# Altium PCB pcb.PcbDoc (part 1 of 2)
Units mm, origin at the board's own origin, x right, y up, seen from the top; angles counter-clockwise.
Board outline 134 x 85 mm, 2 copper layers (Top Layer, Bottom Layer), stack 1.575 mm thick; 121 components, 45 nets, 313 pads, 706 vias.
Unrouted connection lines stored in the file: 44.
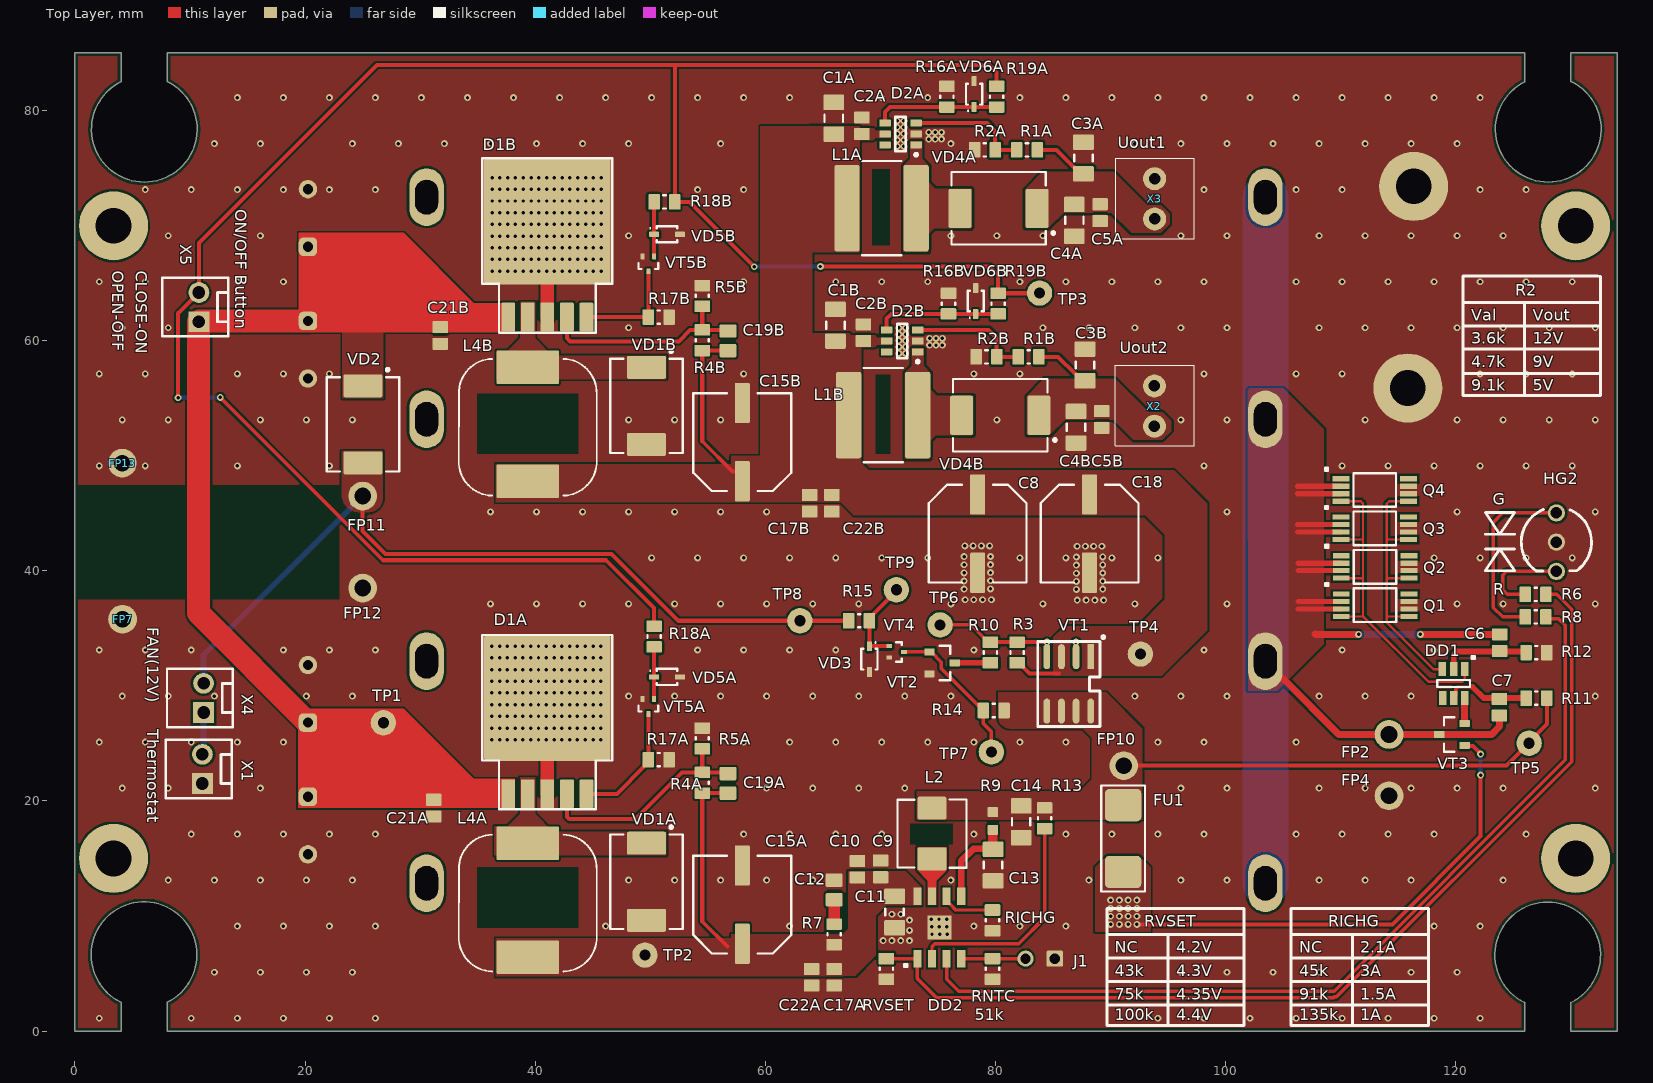
[diagram p0: Top Layer view]
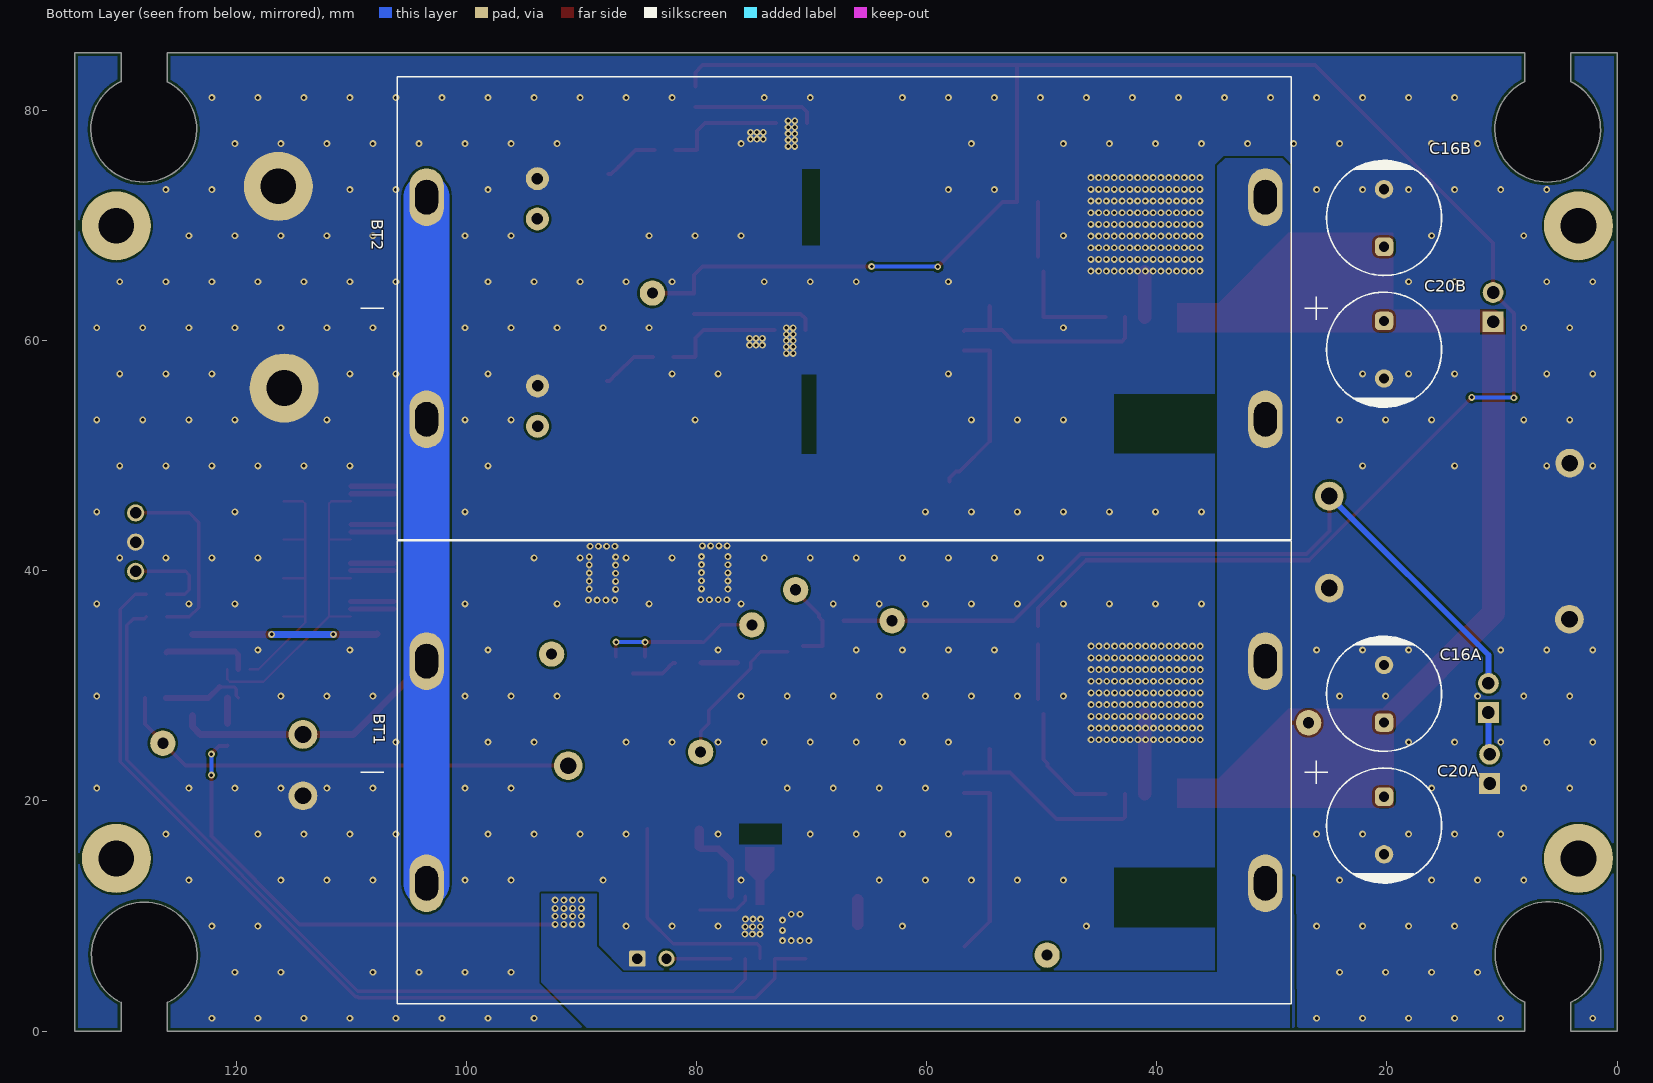
[diagram p1: Bottom Layer view, seen from below]
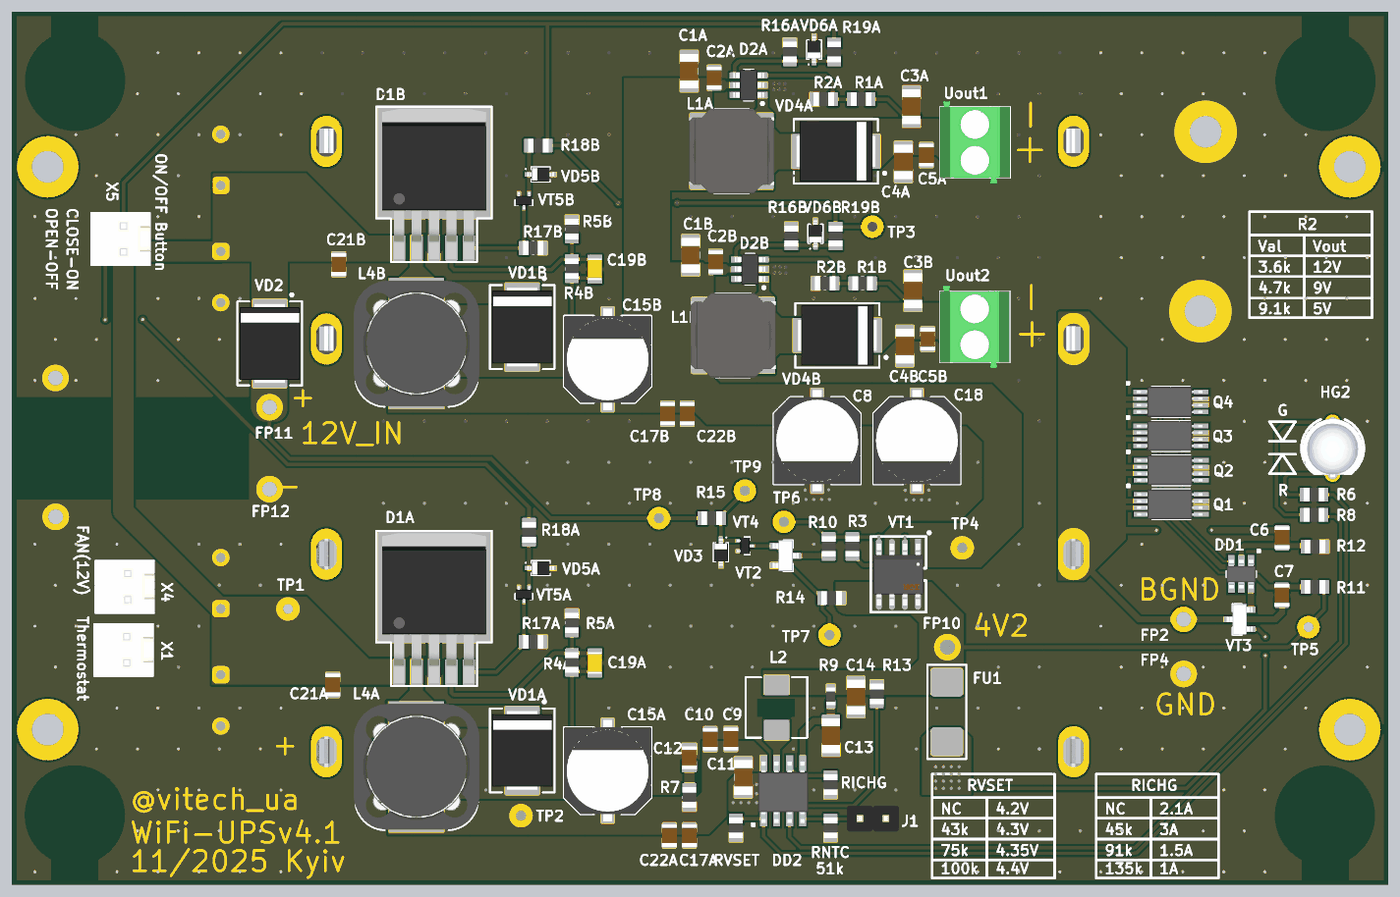
[diagram p3: 3D render of the assembled board from above, using the file's embedded part models]
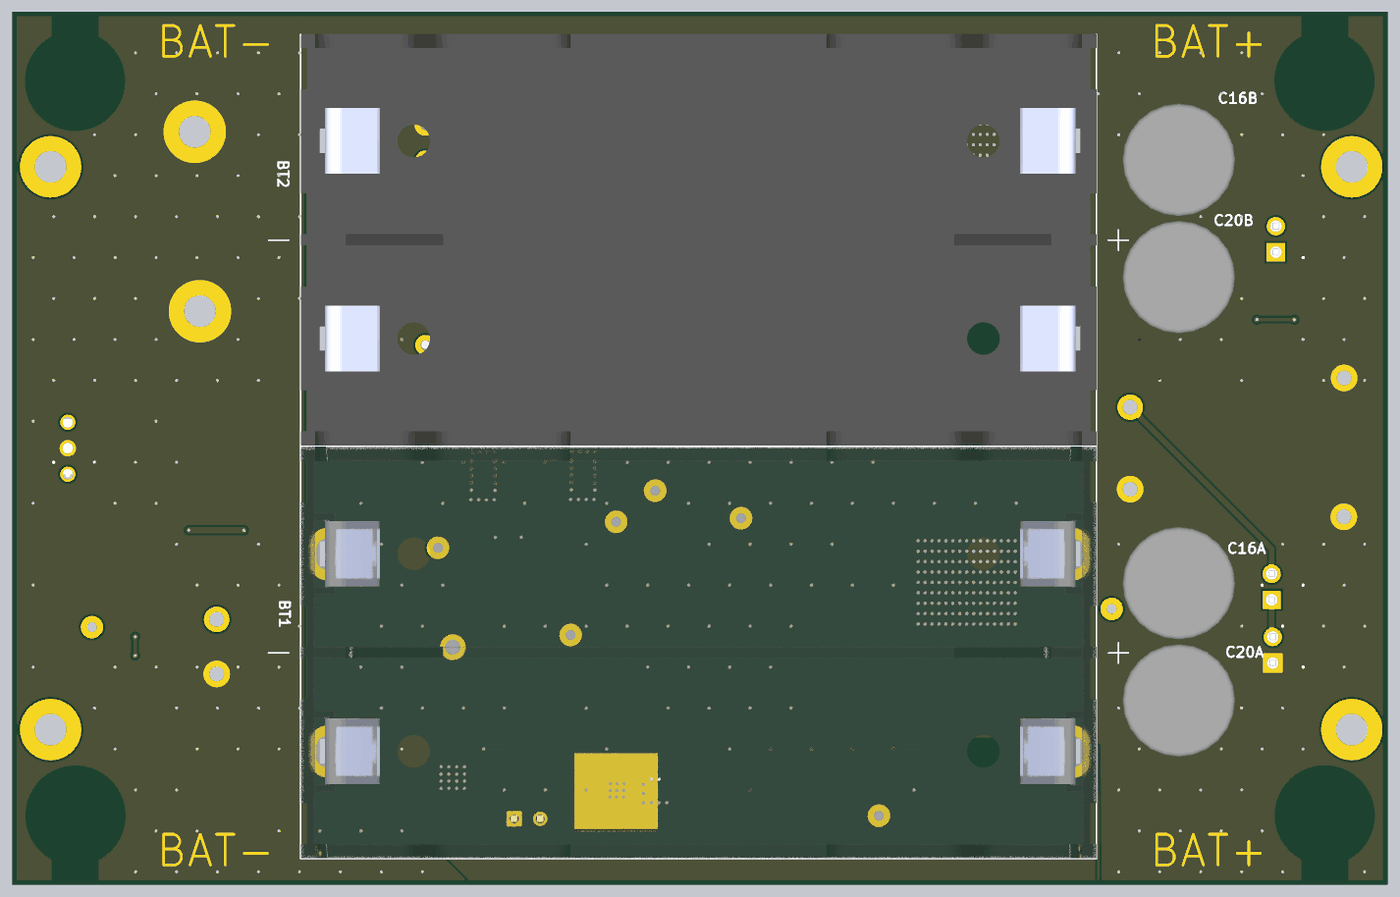
[diagram p4: 3D render of the assembled board from below, using the file's embedded part models]

## Layer stack, top to bottom
Top Solder: solder mask 0.012, Solder Resist, Dk 3.5
Top Layer: signal copper 0.038
Dielectric 1: dielectric 1.4986, FR-4, Dk 4.8
Bottom Layer: signal copper 0.038
Bottom Solder: solder mask 0.012, Solder Resist, Dk 3.5

## Board outline
0,0 4,0 4,2.5 cw(c6,6.636) 8,2.5 8,0 126,0 126,2.5 125.951,2.489 cw(c127.975,6.613) 130,2.489 130,0 134,0 134,85 130,85 130,82.499 130.049,82.499 cw(c128.025,78.375) 126,82.499 126,85 8,85 8,82.499 8.049,82.499 cw(c6.025,78.375) 4,82.499 4,85 0,85

## Design rules (kind name [scope] priority, off if disabled: settings)
BoardOutlineClearance [All] p1: gap=0.3 ignorepadtopadclearanceinfootprint=FALSE except(0: Track-OutlineEdge)
Clearance MiddleVoltage [InNetClass('MiddleVoltage')] p1: gap=0.5 ignorepadtopadclearanceinfootprint=FALSE except(0: Arc-Hole Track-Hole SMDPad-Hole THPad-Hole Via-Hole Fill-Hole Poly-Hole Region-Hole Text-Hole; 0.2: Arc-Text Track-Text SMDPad-Text THPad-Text Via-Text Fill-Text Poly-Text Region-Text Text-Text)
Clearance HighVoltage [InNetClass('HighVoltage')] p2: gap=1 ignorepadtopadclearanceinfootprint=FALSE except(0: Arc-Hole Track-Hole SMDPad-Hole THPad-Hole Via-Hole Fill-Hole Poly-Hole Region-Hole Text-Hole; 0.2: Arc-Text Track-Text SMDPad-Text THPad-Text Via-Text Fill-Text Poly-Text Region-Text Text-Text)
Clearance Standart [All] p3: gap=0.2 ignorepadtopadclearanceinfootprint=FALSE except(0: Arc-Hole Track-Hole SMDPad-Hole THPad-Hole Via-Hole Fill-Hole Poly-Hole Region-Hole Text-Hole)
ComponentClearance [All] p1: gap=0.1 collisioncheckmode=3 verticalgap=0.1 showdistances=TRUE
Height [All] p1: minheight=0 maxheight=40 prefheight=12.7
HoleSize [All] p1: absolutevalues=TRUE maxlimit=12 minlimit=0.3 maxpercent=80.000 minpercent=20.000
HoleToHoleClearance [All] p1: gap=0.25 allowstackedmicrovias=TRUE
MinimumSolderMaskSliver [All] p1: minsoldermaskwidth=0.1
NetAntennae [All] p1: netantennaetolerance=2
PlaneClearance [All] p1: clearance=0.3
PlaneConnect PlaneConnectMiddleCurrent [InNetClass('MiddleCurrent')] p1: planeconnectstyle=Relief reliefexpansion=0.508 reliefentries=4 reliefconductorwidth=0.5 reliefairgap=0.3
PlaneConnect PlaneHighCurrent [InNetClass('HighCurrent')] p2: planeconnectstyle=Relief reliefexpansion=0.508 reliefentries=4 reliefconductorwidth=0.5 reliefairgap=0.35
PlaneConnect [All] p3: planeconnectstyle=Relief reliefexpansion=0.508 reliefentries=4 reliefconductorwidth=0.3 reliefairgap=0.3
PolygonConnect PolygonConnectMiddleCurrent [All vs InNetClass('MiddleCurrent')] p1: connectstyle=Relief reliefconductorwidth=0.4 reliefentries=4 polygonreliefangle="90 Angle" airgapwidth=0.3
PolygonConnect PolygonHighCurrent [InNetClass('HighCurrent')] p2: connectstyle=Relief reliefconductorwidth=0.5 reliefentries=4 polygonreliefangle="90 Angle" airgapwidth=0.3
PolygonConnect PolygonConnect_Keepout [(ObjectKind = 'Track') And (Layer = 'KeepOutLayer')] p3: connectstyle=Direct reliefconductorwidth=0.254 reliefentries=4 polygonreliefangle="90 Angle" airgapwidth=0.254
PolygonConnect PolygonConnect_Via [IsVia] p4: connectstyle=Direct reliefconductorwidth=0.254 reliefentries=4 polygonreliefangle="90 Angle" airgapwidth=0.254
PolygonConnect [All] p5: connectstyle=Direct reliefconductorwidth=0.3 reliefentries=4 polygonreliefangle="90 Angle" airgapwidth=0.25
RoomDefinition STEP_UPA [InComponentClass('STEP_UPA')] p1: confinementstyle=ConfineIn formatcopy=TRUE lockcomponents=FALSE outline 63.538,67.081 90.106,67.081 90.106,83.185 63.538,83.185
RoomDefinition SDB [InComponentClass('SDB')] p2: confinementstyle=ConfineIn formatcopy=TRUE lockcomponents=FALSE outline 15.926,44.298 66.7,44.298 66.7,76.759 15.926,76.759
RoomDefinition SDA [InComponentClass('SDA')] p3: confinementstyle=ConfineIn formatcopy=TRUE lockcomponents=FALSE outline 15.926,5.842 66.7,5.842 66.7,38.303 15.926,38.303
RoomDefinition COMUTATOR [InComponentClass('COMUTATOR')] p4: confinementstyle=ConfineIn formatcopy=TRUE lockcomponents=FALSE outline 61.664,24.765 96.011,24.765 96.011,48.92 61.664,48.92
RoomDefinition STEP_UPB [InComponentClass('STEP_UPB')] p5: confinementstyle=ConfineIn formatcopy=TRUE lockcomponents=FALSE outline 63.678,49.098 90.246,49.098 90.246,65.202 63.678,65.202
RoomDefinition charger [InComponentClass('charger')] p6: confinementstyle=ConfineIn formatcopy=TRUE lockcomponents=FALSE outline -837.893,-778.88 -787.093,-778.88 -787.093,-753.48 -837.893,-753.48
RoutingCorners [All] p1: cornerstyle=45-Degree minsetback=1 maxsetback=3
RoutingVias Power [InNetClass('Power')] p1: holewidth=0.8 width=1.5 viastyle="Through Hole" minholewidth=0.5 minwidth=1 maxholewidth=1.2 maxwidth=3
RoutingVias [All] p2: holewidth=0.4 width=0.8 viastyle="Through Hole" minholewidth=0.3 minwidth=0.6 maxholewidth=1 maxwidth=2
SilkToSilkClearance [All] p1: silktosilkclearance=0
SilkToSolderMaskClearance [IsPad] p1: minsilkscreentomaskgap=0.05 clearancetoexposedcopper=TRUE
SolderMaskExpansion SolderMaskExpansion_VIA [IsVia] p1: expansion=-3 istentingtop=TRUE useseparateexpansions=TRUE expansionbottom=-3 istentingbottom=TRUE
SolderMaskExpansion [All] p2: expansion=0.05 istentingtop=FALSE
SupplyNets "Schematic Supply Nets_1" [InNet('5V_EXT')] p1: voltage=0.000
SupplyNets "Schematic Supply Nets_4" [InNet('GND')] p2: voltage=0.000
SupplyNets "Schematic Supply Nets_3" [InNet('BGND')] p3: voltage=0.000
SupplyNets "Schematic Supply Nets_2" [InNet('12V_EXT')] p4: voltage=0.000
Width Width_ANT [InNetClass('Anthenna')] p1: maxlimit=1.641 minlimit=0.2 preferedwidth=1.641
Width WidthMiddleCurrent [InNetClass('MiddleCurrent')] p2: maxlimit=2 minlimit=0.35 preferedwidth=0.5
Width WidthHighCurrent [InNetClass('HighCurrent')] p3: maxlimit=5 minlimit=0.5 preferedwidth=1
Width [All] p4: maxlimit=4 minlimit=0.2 preferedwidth=0.5
19 further rules are at their usual default settings.

## Classes and differential pairs
channel class STEP-UP: STEP_UPA STEP_UPB
component class Designator: FP7 FP11 FP12 FP13
component class pROTECTOR: BT1 BT2 C6 C7 DD1 FP2 FP4 FU1 Q1 Q2 Q3 Q4 R11 R12 VT3
component class STEP_UPB: C1B C2B C3B C4B C5B D2B L1B R1B R2B R16B R19B VD4B VD6B
component class STEP_UPA: C1A C2A C3A C4A C5A D2A L1A R1A R2A R16A R19A VD4A VD6A
component class SDA: C15A C16A C17A C19A C20A C21A C22A D1A L4A R4A R5A R17A R18A VD1A VD5A VT5A
channel class StepDown_LM2596: SDA SDB
component class main: TP1 TP2 TP3 VD2 X1 X2 X3 X4 X5
component class charger: C9 C10 C11 C12 C13 C14 DD2 FP10 HG2 J1 L2 R6 R7 R8 R9 R13 RICHG RNTC RVSET
component class SDB: C15B C16B C17B C19B C20B C21B C22B D1B L4B R4B R5B R17B R18B VD1B VD5B VT5B
component class COMUTATOR: C8 C18 R3 R10 R14 R15 TP4 TP5 TP6 TP7 TP8 TP9 VD3 VT1 VT2 VT4

## Components (designator, comment, footprint, x,y, rotation, side; value= is the part's Value field where it differs from the comment)
BT1 "18650 Holder 2pcs" BAT_BK-18650-PC4 67.15,22.5 r0 bottom locked
BT2 "18650 Holder 2pcs" BAT_BK-18650-PC4 67.15,62.82 r0 bottom locked
C1A "22uF" C_CERAMIC_1206_MED 65.938,79.328 r90 top (schematic designator C1)
C1B "22uF" C_CERAMIC_1206_MED 66.079,61.344 r90 top (schematic designator C1)
C2A "100nF" C_CERAMIC_0805_HI 68.377,78.678 r90 top (schematic designator C2)
C2B "100nF" C_CERAMIC_0805_HI 68.517,60.694 r90 top (schematic designator C2)
C3A "22uF" C_CERAMIC_1206_MED 87.63,75.87 r90 top (schematic designator C3)
C3B "22uF" C_CERAMIC_1206_MED 87.77,57.887 r90 top (schematic designator C3)
C4A "22uF" C_CERAMIC_1206_MED 86.843,70.46 r270 top (schematic designator C4)
C4B "22uF" C_CERAMIC_1206_MED 86.983,52.476 r270 top (schematic designator C4)
C5A "100nF" C_CERAMIC_0805_HI 89.078,71.132 r270 top (schematic designator C5)
C5B "100nF" C_CERAMIC_0805_HI 89.218,53.148 r270 top (schematic designator C5)
C6 "100nF" C_CERAMIC_0805_HI 123.8,33.757 r270 top
C7 "100nF" C_CERAMIC_0805_HI 123.774,28.143 r270 top
C8 "330uFx16V" CAP-AE-830x1020H30_MED 78.435,43.231 r270 top value=330uF
C9 "100nF" C_CERAMIC_0805_HI 70.002,14.097 r90 top
C10 "10uF" C_CERAMIC_0805_HI 67.996,14.072 r90 top
C11 "22uF" C_CERAMIC_1206_MED 71.222,10.354 r270 top
C12 "10uF" CAP-0805(2012)X125T15 65.964,12.268 r90 top
C13 "22uF" C_CERAMIC_1206_MED 79.781,14.427 r270 top
C14 "22uF" C_CERAMIC_1206_MED 82.22,18.191 r270 top
C15A "330uFx16V" CAP-AE-830x1020H30_MED 57.988,10.998 r90 top value=330uF (schematic designator C15)
C15B "330uFx16V" CAP-AE-830x1020H30_MED 57.988,51.18 r90 top value=330uF (schematic designator C15)
C16A "470uFx16V" CAP-AE-PTH-100D10x125H15 20.244,29.315 r90 bottom value=470uF (schematic designator C16)
C16B "470uFx16V" CAP-AE-PTH-100D10x125H15 20.244,70.666 r90 bottom value=470uF (schematic designator C16)
C17A "100nF" C_CERAMIC_0805_HI 65.964,4.674 r270 top (schematic designator C17)
C17B "100nF" C_CERAMIC_0805_HI 63.83,45.872 r270 top (schematic designator C17)
C18 "330uFx16V" CAP-AE-830x1020H30_MED 88.163,43.231 r270 top value=330uF
C19A "100pF" CAP-0805(2012)X60T10 56.744,21.526 r270 top (schematic designator C19)
C19B "100pF" CAP-0805(2012)X60T10 56.744,59.981 r270 top (schematic designator C19)
C20A "470uFx16V" CAP-AE-PTH-100D10x125H15 20.244,17.863 r270 bottom value=470uF (schematic designator C20)
C20B "470uFx16V" CAP-AE-PTH-100D10x125H15 20.244,59.215 r270 bottom value=470uF (schematic designator C20)
C21A "100nF" C_CERAMIC_0805_HI 31.166,19.38 r270 top (schematic designator C21)
C21B "100nF" C_CERAMIC_0805_HI 31.75,60.452 r270 top (schematic designator C21)
C22A "10uF" C_CERAMIC_0805_HI 64.008,4.674 r270 top (schematic designator C22)
C22B "10uF" C_CERAMIC_0805_HI 65.761,45.872 r270 top (schematic designator C22)
D1A "LM2596S-ADJ" TO-263-5-1 41.046,20.624 r0 top (schematic designator D1)
D1B "LM2596S-ADJ" TO-263-5-1 41.046,62.051 r0 top (schematic designator D1)
D2A "MT3608" MT3608_MED 71.741,77.963 r180 top (schematic designator D2)
D2B "MT3608" MT3608_MED 71.881,59.98 r180 top (schematic designator D2)
DD1 "DW01A-G" DW01A-G 119.807,30.206 r270 top
DD2 "IP2312" IP2313 75.108,9.017 r90 top
FP2 "PAD-1.45mm" PAD-1.45mm 114.189,25.781 r0 top
FP4 "PAD-1.45mm" PAD-1.45mm 114.189,20.447 r0 top
FP7 "PAD-1.45mm" PAD-1.45mm 4.135,35.794 r0 top
FP10 "PAD-1.45mm" PAD-1.45mm 91.135,23.063 r90 top
FP11 "PAD-1.45mm" PAD-1.45mm 25,46.5 r90 top
FP12 "PAD-1.45mm" PAD-1.45mm 25,38.5 r90 top
FP13 "PAD-1.45mm" PAD-1.45mm 4.11,49.358 r0 top
FU1 "10A" FU_2410_6.0x2.5x2.5mm_v2 91.084,16.739 r90 top
HG2 "OSRPMC5B31A" OSRPMC5B31A 128.727,42.494 r90 top
J1 "PLS-2 (Part of PLS-40)" PLS-2 83.871,6.299 r180 top
L1A "4.7uH" SWPA8040S-Series 70.091,71.512 r0 top (schematic designator L1)
L1B "4.7uH" SWPA8040S-Series 70.231,53.529 r0 top (schematic designator L1)
L2 "2.2uH" BMRA00050530-Series 74.473,17.17 r90 top
L4A "22uH" CDRH127-Series 39.346,11.379 r180 top (schematic designator L4)
L4B "22uH" CDRH127-Series 39.346,52.73 r180 top (schematic designator L4)
Q1 "FS8205A" FS8205A 112.974,40.341 r0 top
Q2 "FS8205A" FS8205A 112.974,37.014 r0 top
Q3 "FS8205A" FS8205A 112.949,43.694 r0 top
Q4 "FS8205A" FS8205A 112.949,47.021 r0 top
R1A "68k" R_ANY_CHIP_0805_MED 82.728,76.581 r180 top (schematic designator R1)
R1B "68k" R_ANY_CHIP_0805_MED 82.868,58.598 r180 top (schematic designator R1)
R2A "3.3k" R_ANY_CHIP_0805_MED 79.07,76.581 r180 top (schematic designator R2)
R2B "3.3k" R_ANY_CHIP_0805_MED 79.21,58.598 r180 top (schematic designator R2)
R3 "1k" R_ANY_CHIP_0805_MED 81.864,32.902 r90 top
R4A "30k" R_ANY_CHIP_0805_MED 54.508,21.576 r90 top (schematic designator R4)
R4B "30k" R_ANY_CHIP_0805_MED 54.508,60.031 r90 top (schematic designator R4)
R5A "10k" R_ANY_CHIP_0805_MED 54.508,25.436 r90 top (schematic designator R5)
R5B "10k" R_ANY_CHIP_0805_MED 54.508,63.892 r90 top (schematic designator R5)
R6 "2.2k" R_ANY_CHIP_0805_MED 126.924,37.948 r0 top
R7 "2" R_ANY_CHIP_0805_MED 65.964,8.407 r90 top
R8 "2.2k" R_ANY_CHIP_0805_MED 126.924,35.992 r0 top
R9 "0.51" R_ANY_CHIP_0603_MED 79.756,18.262 r270 top
R10 "22" R_ANY_CHIP_0805_MED 79.553,32.902 r270 top
R11 "100" R_ANY_CHIP_0805_MED 126.995,28.936 r0 top
R12 "1k" R_ANY_CHIP_0805_MED 126.995,32.899 r180 top
R13 "1k" R_ANY_CHIP_0805_MED 84.252,18.491 r90 top
R14 "1k" R_ANY_CHIP_0805_MED 79.832,27.864 r180 top
R15 "1k" R_ANY_CHIP_0805_MED 68.137,35.662 r0 top
R16A "2.2k" R_ANY_CHIP_0805_MED 75.768,81.204 r90 top (schematic designator R16)
R16B "2.2k" R_ANY_CHIP_0805_MED 75.908,63.221 r90 top (schematic designator R16)
R17A "68k" R_ANY_CHIP_0805_MED 50.724,23.596 r0 top value=10k (schematic designator R17)
R17B "68k" R_ANY_CHIP_0805_MED 50.724,62.051 r0 top value=10k (schematic designator R17)
R18A "1k" R_ANY_CHIP_0805_MED 50.317,34.29 r270 top (schematic designator R18)
R18B "1k" R_ANY_CHIP_0805_MED 51.224,72.06 r180 top (schematic designator R18)
R19A "2.2k" R_ANY_CHIP_0805_MED 80.086,81.204 r270 top (schematic designator R19)
R19B "2.2k" R_ANY_CHIP_0805_MED 80.226,63.221 r270 top (schematic designator R19)
RICHG "NC" R_ANY_CHIP_0805_MED 79.731,9.627 r90 top
RNTC "51k" R_ANY_CHIP_0805_MED 79.731,5.41 r90 top
RVSET "NC" R_ANY_CHIP_0805_MED 70.51,5.41 r90 top
TP1 "PAD-0.96mm" PAD-0.96mm 26.797,26.797 r0 top
TP2 "PAD-0.96mm" PAD-0.96mm 49.53,6.604 r90 top
TP3 "PAD-0.96mm" PAD-0.96mm 83.82,64.135 r90 top
TP4 "PAD-0.96mm" PAD-0.96mm 92.583,32.766 r90 top
TP5 "PAD-0.96mm" PAD-0.96mm 126.365,25.019 r90 top
TP6 "PAD-0.96mm" PAD-0.96mm 75.184,35.306 r90 top
TP7 "PAD-0.96mm" PAD-0.96mm 79.629,24.257 r90 top
TP8 "PAD-0.96mm" PAD-0.96mm 62.992,35.662 r90 top
TP9 "PAD-0.96mm" PAD-0.96mm 71.374,38.354 r90 top
VD1A "SK56" SMC 49.657,12.979 r270 top (schematic designator VD1)
VD1B "SK56" SMC 49.657,54.33 r270 top (schematic designator VD1)
VD2 "SK56" SMC 25.019,52.73 r270 top
VD3 "BZX384-A4V7-QX" SOD-323_MED 69.037,32.327 r270 top
VD4A "SK56" SMC 80.261,71.501 r180 top (schematic designator VD4)
VD4B "SK56" SMC 80.401,53.518 r180 top (schematic designator VD4)
VD5A "BZX384-A4V7-QX" SOD-323_MED 51.449,30.785 r0 top (schematic designator VD5)
VD5B "BZX384-A4V7-QX" SOD-323_MED 51.449,69.24 r0 top (schematic designator VD5)
VD6A "BZX384-A4V7-QX" SOD-323_MED 78.13,81.429 r90 top (schematic designator VD6)
VD6B "BZX384-A4V7-QX" SOD-323_MED 78.271,63.446 r90 top (schematic designator VD6)
VT1 "IRF9358PBF" SOIC-8 86.36,30.175 r270 top
VT2 "IRLML6344" SOT-23_MED 75.354,32.002 r180 top
VT3 "2N7002,215" SOT-23_MED 119.659,25.781 r0 top
VT4 "DTC143ZET1G" SOT-416 71.399,32.952 r270 top
VT5A "DTC143ZET1G" SOT-416 49.824,28.219 r180 top (schematic designator VT5)
VT5B "DTC143ZET1G" SOT-416 49.824,66.675 r180 top (schematic designator VT5)
X1 "WH-02S" WF-2S 11.074,21.514 r90 top
X2 "DG350-3.5-02P" DG350-3.5-02P-14-00AH 93.802,54.407 r90 top
X3 "DG350-3.5-02P" DG350-3.5-02P-14-00AH 93.82,72.421 r90 top
X4 "WH-02S" WF-2S 11.176,27.686 r90 top
X5 "WH-02S" WF-2S 10.77,61.646 r90 top

## Footprints (in the part's own frame and the unit in brackets; to place one, negate y for a bottom-side part, rotate by r counter-clockwise, add the part's x,y. Pads: shape width x height; smd on the part's side, far side on the other; paste and mask are expansions set on the pad)
BAT_BK-18650-PC4 [mm]
  oval 3x5 hole 2 slot 3 at 90 deg: 1+(-36.6,9.65) 1-(36.3,9.65) 2+(-36.6,-9.65) 2-(36.3,-9.65)
  silkscreen extent -42,-20.11 42,20.11, body extent -38.86,-20.14 38.84,20.07, height 22.5
BMRA00050530-Series [mm] "5.4x5.7x2.8mm Shielded Power Inductor"
  rrect15% 2x2.5 smd mask+0.05: 1(-2.2,0) 2(2.2,0)
  silkscreen extent -2.96,-3 2.96,3, body extent -2.95,-2.88 2.95,2.88, height 3
C_CERAMIC_0805_HI [mm] "Chip Capacitor, 2-Leads, Body 2,00x1,25mm, IPC High Density"
  rrect15% 1.05x1.35 smd mask+0.05: 1(-0.725,0) 2(0.725,0)
  Top Layer pour cut-out: -0.05,0.65 0.05,0.65 0.05,-0.65 -0.05,-0.65
  body extent -1.1,-0.72 1.1,0.73, height 1.35
C_CERAMIC_1206_MED [mm] "Chip Capacitor, 2-Leads, Body 3,20x1,60mm, IPC Medium Density"
  rrect15% 1.35x1.8 smd mask+0.05: 1(-1.375,0) 2(1.375,0)
  silkscreen extent -0.3,-0.8 0.3,0.8, body extent -1.7,-0.9 1.7,0.9, height 1.8
CAP-0805(2012)X60T10 [mm] "Chip Capacitor, 2-Leads, Body 2,00x1,25mm, IPC Medium Density"
  rrect15% 1.15x1.45 smd mask+0.05: 1(-0.85,0) 2(0.85,0)
  Top Layer pour cut-out: -0.05,0.651 0.05,0.651 0.05,-0.649 -0.05,-0.649
  body extent -1.07,-0.7 1.08,0.7, height 0.7
CAP-0805(2012)X125T15 [mm] "Chip Capacitor, 2-Leads, Body 2,00x1,25mm, IPC Medium Density"
  rrect15% 1.15x1.45 smd mask+0.05: 1(-0.85,0) 2(0.85,0)
  Top Layer pour cut-out: -0.05,0.651 0.05,0.651 0.05,-0.649 -0.05,-0.649
  body extent -1.1,-0.72 1.1,0.73, height 1.4
CAP-AE-830x1020H30_MED [mm] "Aluminum Electrolytic Capacitor, Body 8,30x8,30x10,50mm, IPC Medium Density"
  rrect15% 3.5x1.3 smd mask+0.05: 1(-3.4,0) 2(3.4,0)
  silkscreen extent -4.25,-4.25 4.25,4.25, body extent -4.95,-4.25 4.95,4.25, height 10.5
CAP-AE-PTH-100D10x125H15 [mm] "PTH Aluminium Electrolytic Capacitor, Diameter 10mm, Height 12.5mm"
  rrect50% 1.6x1.6 hole 0.9: 1(-2.5,0)
  round 1.6 hole 0.9: 2(2.5,0)
  silkscreen extent -5,-5 5,5, body extent -5.5,-5.5 5.5,5.5, height 14
CDRH127-Series [mm] "SMD power inductor series"
  rrect5% 5.4x2.9 smd mask+0.05: 1(0,-4.95) 2(0,4.95)
  silkscreen extent -6,-5.69 6,6.19, body extent -6.15,-6.15 6.15,6.15, height 8
DG350-3.5-02P-14-00AH [mm] "Screw Terminal, Pitch 3,5 mm, 2-Pin, 300V, 7A, Green"
  round 2 hole 1: 1(-1.843,0) 2(1.657,0)
  silkscreen extent -3.54,-3.45 3.45,3.4, body extent -4.05,-3.4 3.95,3.4, height 8.4
DW01A-G [mm]
  rect 1.2x0.65 smd: 1(-1.25,0.95) 2(-1.25,0) 3(-1.25,-0.975) 4(1.25,-0.95) 5(1.25,0) 6(1.25,0.95)
  rect 1.2x0.65 on Mech3: 1(-1.25,0.95) 2(-1.25,0) 3(-1.25,-0.975) 4(1.25,-0.95) 5(1.25,0) 6(1.25,0.95)
  silkscreen extent -2.39,-1.43 0.3,1.83, body extent -1.4,-1.43 1.4,1.43, height 1.35
FS8205A [mm] "Dual N-Channel Enahncement Mode Power MOSFET"
  rect 1.475x0.45 smd: 1(-2.938,0.975) 2(-2.938,0.325) 3(-2.938,-0.325) 4(-2.938,-0.975) 5(2.938,-0.975) 6(2.938,-0.325) 7(2.938,0.325) 8(2.938,0.975)
  silkscreen extent -4.32,-1.47 1.85,1.93, body extent -3.33,-1.47 3.07,1.47, height 1.2
FU_2410_6.0x2.5x2.5mm_v2 [mm]
  rrect25% 2.8x3.15 smd mask+0.05: 1(-2.9,0) 2(2.9,0)
  silkscreen extent -4.6,-1.9 4.6,1.9, body extent -3.13,-1.32 3.13,1.32, height 2.37
IP2313 [mm] "ESOP-8L DC-DC Converters RoHS"
  rect 1.525x0.7 smd: 1(-2.712,1.905) 2(-2.712,0.635) 3(-2.712,-0.635) 4(-2.712,-1.905) 5(2.712,-1.905) 6(2.712,-0.635) 7(2.712,0.635) 8(2.712,1.905)
  rect 2.083x2.083 smd: 9(0,0)
  silkscreen extent -3.43,2.79 -3.18,3.05, body extent -3.13,-2.45 2.87,2.45, height 1.65
MT3608_MED [mm] "SOT23, 6-Leads, Body 2,90x2,80mm, Pitch 0,95mm, IPC Medium Density"
  rrect15% 1x0.6 smd: 1(-1.35,0.95) 2(-1.35,0) 3(-1.35,-0.95) 4(1.35,-0.95) 5(1.35,0) 6(1.35,0.95)
  silkscreen extent -1.48,-1.5 0.45,1.92, body extent -1.5,-1.5 1.5,1.5, height 1.45
OSRPMC5B31A [mm]
  round 1.5 hole 1 mask+0.05: A1(-2.54,0) A2(2.54,0) CC(0,0)
  silkscreen extent -2.5,-3.05 2.84,3.05, body extent -2.87,-2.95 2.87,2.95, height 13.7
PAD-0.96mm [mm]
  round 2.2 hole 0.96: 1(0,0)
PAD-1.45mm [mm]
  round 2.5 hole 1.45: 1(0,0)
PLS-2 [mm] "2.54mm 2-pin solder pads"
  rrect15% 1.4x1.4 hole 0.9: 1(-1.27,0)
  round 1.4 hole 0.9: 2(1.27,0)
  body extent -2.54,-1.3 2.54,1.24, height 8.54
R_ANY_CHIP_0603_MED [mm] "Chip Resistor, 2-Leads, Body 1,60x0,80mm, IPC Medium Density"
  rrect15% 0.85x0.9 smd mask+0.05: 1(-0.775,0) 2(0.775,0)
  body extent -0.85,-0.45 0.85,0.45, height 0.55
R_ANY_CHIP_0805_MED [mm] "Chip Resistor, 2-Leads, Body 2,00x1,25mm, IPC Medium Density"
  rrect15% 1x1.35 smd: 1(-0.9,0) 2(0.9,0)
  silkscreen extent -0.1,-0.58 0.1,0.57, body extent -1,-0.67 1,0.68, height 0.6
SMC [mm] "Molded Diode, 2-Leads, Body 7,95x5,90mm, IPC Medium Density"
  rrect15% 2x3.4 smd: AN(3.35,0) CA(-3.35,0)
  silkscreen extent -4.87,-3.15 4.1,3.15, body extent -3.9,-2.95 3.9,2.95, height 2.45
SOD-323_MED [mm] "SOD-323, 2-Leads, Body 1,25x2,50mm, IPC Medium Density"
  rrect15% 0.85x0.45 smd paste+0 mask+0.05: AN(1.125,0) CA(-1.125,0)
  silkscreen extent -1.5,-0.7 0.9,0.7, body extent -1.3,-0.67 1.3,0.68, height 1.1
SOIC-8 [mm]
  rect 2.174x0.583 smd paste+0 mask+0: 1(-2.366,1.905)
  rect 2.174x0.583 on Mech3 paste+0 mask+0: 1(-2.366,1.905)
  rrect100% 2.174x0.583 smd paste+0 mask+0: 2(-2.366,0.635) 3(-2.366,-0.635) 4(-2.366,-1.905) 5(2.366,-1.905) 6(2.366,-0.635) 7(2.366,0.635) 8(2.366,1.905)
  rrect100% 2.174x0.583 on Mech3 paste+0 mask+0: 2(-2.366,0.635) 3(-2.366,-0.635) 4(-2.366,-1.905) 5(2.366,-1.905) 6(2.366,-0.635) 7(2.366,0.635) 8(2.366,1.905)
  silkscreen extent -4.19,-2.7 3.7,3.12, body extent -3.7,-2.7 3.7,2.7, height 0.25
SOT-23_MED [mm] "SOT23, 3-Leads, Body 2,92x2,37mm, Pitch 0,95mm, IPC Medium Density"
  rrect15% 0.9x0.6 smd mask+0.05: 1(1.1,-0.95) 2(1.1,0.95) 3(-1.1,0)
  silkscreen extent -0.7,-1.5 0.2,1.5, body extent -1.27,-1.5 1.28,1.5, height 1.15
SOT-416 [mm]
  rrect15% 0.35x0.5 smd mask+0.05: 1(-0.5,-0.65) 2(0.5,-0.65) 3(0,0.65)
  silkscreen extent -0.85,-0.05 0.85,0.45, body extent -0.8,-0.8 0.8,0.8, height 0.78
SWPA8040S-Series [mm] "Power Wire Wound Inductor, 2-Leads, Body 8,00x8,00mm, IPC Medium Density"
  rrect15% 2.2x7.5 smd: 1(-3,0) 2(3,0)
  silkscreen extent -1.7,-4.1 1.7,4.1, body extent -4.15,-4.15 4.15,4.15, height 4.2
TO-263-5-1 [mm]
  rrect15% 1.2x2.5 smd mask+0.05: 1(-3.4,0) 2(-1.7,0) 3(0,0) 4(1.7,0) 5(3.4,0)
  rrect5% 11x11 smd mask+0.05: 6(0,8.35)
  silkscreen extent -5.65,-1.35 5.65,13.8, body extent -5.08,-1.07 5.08,13.57, height 4.57
WF-2S [mm] "Connector; Header; 2 Position"
  rect 1.8x1.8 hole 1.1: 1(0,0)
  round 1.8 hole 1.1: 2(2.54,0)
  silkscreen extent -1.27,-2.54 3.81,3.18, body extent -1.2,-2.6 3.8,3.2, height 11.62

## Part data
BT1 BT2: "Battery Holder (Open) 18650 2 Cell PC Pin", Package=None, Availability=Unavailable, MP=BK-18650-PC4, Price=None
C1A C1B C3A C3B C4A C4B C11 C13 C14: library part 1206B102K102CG, "22uF 25V", Dielectric Type=X7R, Manufacturer=SAMSUNG, Package=1206, Part Number=CL31A226KAHNNNE, Supplier Part Number 1=791-1206B102K102CT, Temperature Range="-55°C ~ 125°C", Tolerance=±10%, Voltage=25V, Component Status=Released, Component Type=SMD, ComponentLink1Description=Datasheet, ComponentLink1URL=https://eu.mouser.com/datasheet/2/210/Middle_and_High_Voltage_DS-1535659.pdf, Part Type="Ceramic / X7R / 1206", Price=0, Replacement=NONE, Standard Lead Time="31 Weeks", Supplier 1=Mouser
C2A C2B C5A C5B C6 C7 C9 C10 C17A C17B C21A C21B C22A C22B: library part CERAMIC_0805, Dielectric Type=C0G/NP0, Manufacturer=Hitano, Package=0805, Part Number=**, Temperature Range="-55°C ~ 125°C", Tolerance=±5%, Voltage=50V, Component Status=Released, Component Type=SMD, ComponentLink1Description=Datasheet, ComponentLink1URL=\\altiumdb.ajax.local\files\Datasheet\Capacitor\Hitano-MLCC.pdf, GUID_1C=32087c8a-96b8-11ea-ab61-0050569f2651, Part Type="Ceramic / C0G(NP0) / 0402", Price=0, Replacement=NONE
C8 C15A C15B C18: library part EEE-1HA330AP, "330uF 50V ±20% Size F D8x10.2mm SMD Aluminum Electrolytic Capacitor, 110mA Ripple Current, 2000 Hrs @ 85°C", Dielectric Type=NONE, Manufacturer=Panasonic, Package="Size F D8x10.2mm", Part Number=EEEFK1C331P, Temperature Range="-40°C ~ 85°C", Tolerance=±20%, Voltage=16V, Component Status=Released, Component Type=SMD, ComponentLink1Description=Datasheet, ComponentLink1URL=https://eu.mouser.com/datasheet/2/315/ABA0000C1142-947446.pdf, Part Type=Aluminum, Price=0.625, Replacement=NONE, Standard Lead Time="46 Weeks", Supplier 1=Mouser, Supplier Part Number 1=EEEFK1C331P
C12: library part CL21A106KOQNNNE, "10uF 16V Х5R ±10% 0805 Ceramic Capacitor RoHS", Dielectric Type=X5R, Manufacturer="Samsung Electro-Mechanics", Package=0805, Supplier Part Number 1=1276-1096-2-ND, Temperature Range="-55°C ~ 85°C", Tolerance=±10%, Voltage=16V, Ajax_1C_ID=2350, Ajax_1C_PN="10uF 16V Х5R 10% 0805 CL21A106KOQNNNE Ceramic Capacitor SMD RoHS", Ajax_1С_Status="Mass Production", Component Status=Released, Component Type=SMD, ComponentLink1Description=Datasheet, ComponentLink1URL=https://media.digikey.com/pdf/Data%20Sheets/Samsung%20PDFs/CL_Series_MLCC_ds.pdf, GUID_1C=272845d6-647b-11e2-9b5b-6c626deda1bb, Part Number=CL21A106KOQNNNE, Part Type="Ceramic / X5R / 0805", Price=0,0072, Replacement=NONE, Standard Lead Time="22 Weeks", Supplier 1=Digi-Key
C16A C16B: library part EXR471M16B, "470uF 16V D10x12.5mm Electrolytic Low Impedance", Dielectric Type=NONE, Manufacturer=Hitano, Package=D10x12.5mm, Temperature Range="-40°C ~ 105°C", Tolerance=±20%, Voltage=16V, Ajax_1C_ID=15747, Ajax_1C_PN="470uF 16V 10x12.5mm EXR EXR471M16B-Hitano pcs", Ajax_1С_Status="Mass Production", Component Status=Released, Component Type=PTH, ComponentLink1Description=Datasheet, ComponentLink1URL=https://www.hitano.com.tw/wp-content/uploads/doc/EXR_20200408.pdf, GUID_1C=3364ee07-6280-11e9-ab4f-0050569f2651, Part Number=EXR471M16B, Part Type=Aluminum, Price=0,045, Replacement=NONE, Standard Lead Time=NONE
C19A C19B: library part CC0805JRNPO0BN101, "100pF 100V C0G, NP0 ±5% 0805 Ceramic Capacitor RoHS", Dielectric Type=C0G/NP0, Manufacturer=Yageo, Package=0805, Supplier Part Number 1=603-CC805JRNPO0BN101, Temperature Range="-55°C ~ 125°C", Tolerance=±5%, Voltage=100V, Ajax_1C_PN=NONE, Ajax_1С_Status="RND Only", Component Status=Released, Component Type=SMD, ComponentLink1Description=Datasheet, ComponentLink1URL=https://eu.mouser.com/datasheet/2/447/UPY_NP0X7R_MV_100_to_630V_24-2604388.pdf, Part Number=CC0805JRNPO0BN101, Part Type="Ceramic / C0G(NP0) / 0805", Price=NONE, Replacement=NONE, Standard Lead Time="14 Weeks", Supplier 1=Mouser
C20A C20B: library part EXR471M16B, "470uF 16V D10x12.5mm Electrolytic Low Impedance", Dielectric Type=NONE, Manufacturer=Hitano, Package=D10x12.5mm, Part Number="ECAP 470/16V 0812 105'C EHR", Temperature Range="-40°C ~ 105°C", Tolerance=±20%, Voltage=16V, Ajax_1C_ID=15747, Ajax_1C_PN="470uF 16V 10x12.5mm EXR EXR471M16B-Hitano pcs", Ajax_1С_Status="Mass Production", Component Status=Released, Component Type=PTH, ComponentLink1Description=Datasheet, ComponentLink1URL=https://www.hitano.com.tw/wp-content/uploads/doc/EXR_20200408.pdf, GUID_1C=3364ee07-6280-11e9-ab4f-0050569f2651, Part Type=Aluminum, Price=0,045, Replacement=NONE, Standard Lead Time=NONE
D1A D1B: "SIMPLE SWITCHER Power Converter 150-kHz 3-A Step-Down Voltage Regulator", Manufacturer="Texas Instruments", Package=TO-263, Supplier Part Number 1=926-LM2596S-ADJ/NOPB, Temperature Range="-40°C ~ 125°C", Ajax_1C_ID=5535, Ajax_1C_PN="LM2596S-ADJ 150 kHz 3A Step-Down Voltage Regulator", Ajax_1С_Status="Mass Production", Component Status=Released, Component Type=SMD, ComponentLink1Description=Datasheet, ComponentLink1URL=http://www.ti.com/lit/ds/symlink/lm2596.pdf, GUID_1C=db77318d-6bf0-11e4-9c1d-a45d36c4a9e5, Part Number=LM2596S-ADJ, Part Type="Power / DC-DC / Buck", Price=0,44526902, Replacement=NONE, Standard Lead Time="6 Weeks", Supplier 1=Mouser
D2A D2B: "2V-24V Input High Efficiency 1.2MHz 2A Step Up Converter", Manufacturer=Aerosemi, Package=SOT-23-6, Temperature Range="-40°C ~ 85°C", Ajax_1C_ID=8101, Ajax_1C_PN="MT3608 Aerosemi 2A Step Up Converter IC SOT-23-6", Ajax_1С_Status="Mass Production", Component Status=Released, Component Type=SMD, ComponentLink1Description=Datasheet, ComponentLink1URL=https://www.olimex.com/Products/Breadboarding/BB-PWR-3608/resources/MT3608.pdf, GUID_1C=8b925ac5-fc04-11e5-817b-d8cb8a9acc66, Lifecycle="Not Recommended", Part Number=MT3608, Part Type="Power / DC-DC / Boost", Price=0,12, Replacement=NONE, Standard Lead Time=NONE
DD1: "One Cell Lithium-ion/Polymer Battery Protection IC", Component Type=SMD
FP2 FP4 FP7 FP10 FP11 FP12 FP13: "1.45mm Pad for Plug-In or Receptacle", Manufacturer=NONE, Ajax_1C_PN=NONE, Ajax_1С_Status="RND Only", Component Status=Released, Component Type=PTH, ComponentLink1Description=Datasheet, ComponentLink1URL=NONE, Part Number=PAD-1.45mm, Part Type=Pad, Price=NONE, Replacement=NONE, Temperature Range=NONE
FU1: library part FUSE_SMD_2410_v2, "Medium Blow Fuse 65V 15A SMD 2410", Manufacturer="BEL FUSE", Max Operating Temperature=85°C, Min Operating Temperature=-40°C, Package=2410, Part Number=0679L9100-01, Power Rating="10A (Hold)", Mount=SMT, Number of Pins=2, Type=Запобіжник
HG2: "5mm Phoenix Red & Pure Green LED, 625nm and 525nm, 30°", Color="Red, Green", Manufacturer=OptoSupply, Package=5mm, Temperature Range="-30°C ~ 85°C", Ajax_1C_ID=42089, Ajax_1C_PN="OSRPMC5B31A F5  RED/GREEN 3.3V  Common Cathode", Ajax_1С_Status="RND Only", Component Status="On Review", Component Type=PTH, ComponentLink1Description=Datasheet, ComponentLink1URL=\\altiumdb.ajax.local\files\Datasheet\Opto\OSRPMC5B31A.pdf, GUID_1C=10faf48a-c158-11ec-a35b-005056994834, Part Number=OSRPMC5B31A, Part Type="LED / 5mm", Price=0,125, Replacement=NONE, Wavelength="625nm, 525nm"
J1: library part DS1021-02SF11, "2 Pin 2.54mm Male Header, Vertical, 3mm and 6.1mm, PLS-2", Manufacturer=Connfly, Temperature Range="-40°C ~ 105°C", Ajax_1C_ID=1215, Ajax_1C_PN="PLS40, планки со штырьками", Ajax_1С_Status="Mass Production", Component Status=Released, Component Type=PTH, ComponentLink1Description=Datasheet, ComponentLink1URL=\\altiumdb.ajax.local\files\Datasheet\Connectors\DS1021.pdf, GUID_1C=10be163c-dd40-11e0-af93-6c626deda1bb, Part Number=DS1021-02SF11, Part Type="Header / Male Pin / Single Row", Price=0,001875, Replacement=NONE
L1A L1B: library part SWPA8040S4R7NT, "4.7uH Magnetic-Resin Shielded Wirewound Inductor 4.1 A 25mOhm Max", Current=4.1A, Manufacturer="Shenzhen Sunlord Electronics", Package=8.0x8.0x4.0mm, Saturation Current=5.9A, Supplier Part Number 1=3442-SWPA8040S4R7NTTR-ND, Temperature Range="-40°C ~ 125°C", Tolerance=±30%, Ajax_1C_ID=85672, Ajax_1C_PN="4.7uH 30% 4.1A 25mOhm Max SWPA8040S4R7NT SMD Power Inductor", Ajax_1С_Status="RND Only", Component Status=Released, Component Type=SMD, ComponentLink1Description=Datasheet, ComponentLink1URL=\\altiumdb.ajax.local\files\Datasheet\Inductors\SWPA_Series_of_SMD_Power_Inductor.pdf, GUID_1C=9a5367f7-7c8d-11ee-a921-00505699469b, Part Number=SWPA8040S4R7NT, Part Type="Power / Ferrite Core", Price=0,83075, Replacement=NONE, Standard Lead Time="16 Weeks", Supplier 1=Digi-Key
L2: library part BMRA000505302R2MA1, "2.2uH 5A 35mOhm max Closed Magnetic, Molding Processing, Ultra High Current Power Inductor", Current=5A, Manufacturer=Chilisin, Package=5.4x5.7x2.8mm, Saturation Current=8A, Supplier Part Number 1=553-BMRA000505302R2MA1TR-ND, Temperature Range="-55°C ~ 125°C", Tolerance=±20%, Ajax_1C_ID=84493, Ajax_1C_PN="2.2uH 20% 5A 5.7x5.4mm BMRA000505302R2MA1 Chilisin Electronics", Ajax_1С_Status="RND Only", Component Status=Released, Component Type=SMD, ComponentLink1Description=Datasheet, ComponentLink1URL=https://eu.mouser.com/datasheet/2/447/BMRx_Series-2943964.pdf, GUID_1C=5ef22b21-6e83-11ee-a91e-00505699469b, Part Number=BMRA000505302R2MA1, Part Type="Power / Wirewound", Price=0,7, Replacement=NONE, Supplier 1=Digi-Key
L4A L4B: library part CDRH127NP-102MC, "22 µH Shielded Inductor 2.9 A 66mOhm Max Nonstandard", Current=2.9A, Manufacturer=Sumida, Package=12.3x12.3x8.0mm, Part Number=CDRH124NP-220MC, Saturation Current=3.8A, Supplier Part Number 1=851-CDRH127NP-102MC, Temperature Range="-40°C ~ 100°C", Tolerance=±20%, Component Status=Released, Component Type=SMD, ComponentLink1Description=Datasheet, ComponentLink1URL=https://imrad.com.ua/ru/cdrh124np-220mc, Part Type="Power / Ferrite Core", Price=1.55, Replacement=NONE, Standard Lead Time="17 Weeks", Supplier 1=Mouser
Q1 Q2 Q3 Q4: "Dual N-Channel Enahncement Mode Power MOSFET", ComponentLink1Description=Data, ComponentLink1URL=https://www.ic-fortune.com/upload/Download/FS8205A-DS-12_EN.pdf, Datasheet=https://www.ic-fortune.com/upload/Download/FS8205A-DS-12_EN.pdf
R1A R1B R16A R16B R17A R17B: library part RC0805JR-072K2L, "2.2 kOhms ±5% 1/8W 0805 Thick Film Resistor", Manufacturer=Yageo, Package=0805, Power Rating=0.125W, Supplier Part Number 1=311-2.2KARTR-ND, Temperature Range="-55°C ~ 155°C", Temperature Stability=±100ppm/°C, Tolerance=±5%, Voltage=150V, Ajax_1C_ID=26119, Ajax_1C_PN="2.2k 5% 0805 Resistors SMD RoHS", Ajax_1С_Status="RND Only", Component Status=Released, Component Type=SMD, ComponentLink1Description=Datasheet, ComponentLink1URL=https://eu.mouser.com/datasheet/2/447/PYu_RC_Group_51_RoHS_L_11-1984063.pdf, GUID_1C=80325ec8-617a-11eb-ab6f-0050569f2651, Part Number=RC0805JR-072K2L, Part Type="Thick Film", Replacement=NONE, Supplier 1=Digi-Key
  R1A R1B R17A R17B: Price=0,005
  R16A R16B: Price=0.0011
R2A R2B: library part RC0805JR-073K3L, "3.3 kOhms ±5%, 1/8W 0805 Thick Film Resistor", Manufacturer=Yageo, Package=0805, Power Rating=0.125W, Temperature Range="-55°C ~ 155°C", Temperature Stability=±100ppm/°C, Tolerance=±5%, Voltage=150V, Ajax_1C_ID=9030, Ajax_1C_PN="3.3k 5% 0805 Resistors SMD RoHS", Ajax_1С_Status="RND Only", Component Status=Released, Component Type=SMD, ComponentLink1Description=Datasheet, ComponentLink1URL=https://eu.mouser.com/datasheet/2/447/PYu_RC_Group_51_RoHS_L_10-1664068.pdf, GUID_1C=cb9785ec-9b47-11e6-8242-d8cb8a9acc66, Part Number=RC0805JR-073K3L, Part Type="Thick Film", Price=0,001081, Replacement=NONE
R3 R6 R8 R14 R15 R18A R18B R19A R19B: library part RC0805FR-072K2L, "2.2 kOhms ±1% 1/8W 0805 Thick Film Resistor", Manufacturer=Yageo, Package=0805, Power Rating=0.125W, Supplier Part Number 1=603-RC0805FR-072K2L, Temperature Range="-55°C ~ 155°C", Temperature Stability=±100ppm/°C, Tolerance=±1%, Voltage=150V, Ajax_1C_ID=30906, Ajax_1C_PN="2.2k 1% 0805 Resistors SMD RoHS", Ajax_1С_Status="RND Only", Component Status=Released, Component Type=SMD, ComponentLink1Description=Datasheet, ComponentLink1URL=https://eu.mouser.com/datasheet/2/447/YAGEO_PYu_RC_Group_51_RoHS_L_12-3313492.pdf, GUID_1C=690422a9-c9eb-11eb-ab74-0050569f2651, Part Number=RC0805FR-072K2L, Part Type="Thick Film", Price=0.0014, Replacement=NONE, Supplier 1=Mouser
R4A R4B: library part RC0805FR-0730KL, "30 kOhms ±1%, 1/8W 0805 Thick Film Resistor", Manufacturer=Yageo, Package=0805, Power Rating=0.125W, Supplier Part Number 1=311-30.0KCRTR-ND, Temperature Range="-55°C ~ 155°C", Temperature Stability=±100ppm/°C, Tolerance=±1%, Voltage=150V, Ajax_1C_ID=9642, Ajax_1C_PN="30k 1% 0805 Resistors SMD RoHS", Ajax_1С_Status="Mass Production", Component Status=Released, Component Type=SMD, ComponentLink1Description=Datasheet, ComponentLink1URL=https://eu.mouser.com/datasheet/2/447/PYu_RC_Group_51_RoHS_L_10-1664068.pdf, GUID_1C=71e2aa09-07e0-11e7-82d0-d8cb8a9acc66, Part Number=RC0805FR-0730KL, Part Type="Thick Film", Price=0,001, Replacement=NONE, Supplier 1=Digi-Key
R5A R5B: library part RC0805FR-0710K2L, "10 kOhms ±1%, 1/8W 0805 Thick Film Resistor", Manufacturer=Yageo, Package=0805, Power Rating=0.125W, Supplier Part Number 1=311-10.2KCRTR-ND, Temperature Range="-55°C ~ 155°C", Temperature Stability=±100ppm/°C, Tolerance=±1%, Voltage=150V, Ajax_1C_ID=13943, Ajax_1C_PN="10.2k 1% 0805 Resistors SMD RoHS", Ajax_1С_Status="Mass Production", Component Status=Released, Component Type=SMD, ComponentLink1Description=Datasheet, ComponentLink1URL=https://eu.mouser.com/datasheet/2/447/PYu_RC_Group_51_RoHS_L_10-1664068.pdf, GUID_1C=8bc9d0ce-c58a-11e8-ab47-0050569f2651, Part Number=RC0805FR-0710K2L, Part Type="Thick Film", Price=0,0014, Replacement=NONE, Supplier 1=Digi-Key
R7: library part RC0805FR-072RL, "2 Ohm ±1%, 1/8W 0805 Thick Film Resistor", Manufacturer=Yageo, Package=0805, Power Rating=0.125W, Supplier Part Number 1=603-RC0805FR-072RL, Temperature Range="-55°C ~ 155°C", Temperature Stability=±200ppm/°C, Tolerance=±1%, Voltage=150V, Ajax_1C_ID=9244, Ajax_1C_PN="2R 1% 0805  Resistors SMD RoHS", Ajax_1С_Status="RND Only", Component Status=Released, Component Type=SMD, ComponentLink1Description=Datasheet, ComponentLink1URL=https://eu.mouser.com/datasheet/2/447/PYu_RC_Group_51_RoHS_L_10-1664068.pdf, GUID_1C=2cef56fd-bde9-11e6-826e-d8cb8a9acc66, Part Number=RC0805FR-072RL, Part Type="Thick Film", Price=0,09, Replacement=NONE, Supplier 1=Mouser
R9: library part RL0603FR-070R51L, "510 mOhms ±1%, 1/10W 0603 Thick Film Resistor", Manufacturer=Yageo, Package=0603, Power Rating=0.1W, Supplier Part Number 1=311-.51QTR-ND, Temperature Range="-55°C ~ 155°C", Temperature Stability=±300ppm/°C, Tolerance=±1%, Voltage=NONE, Ajax_1C_ID=15962, Ajax_1C_PN="0.51R 1% 0603 Resistors SMD RoHS", Ajax_1С_Status="RND Only", Component Status=Released, Component Type=SMD, ComponentLink1Description=Datasheet, ComponentLink1URL=https://www.yageo.com/upload/media/product/productsearch/datasheet/rchip/PYu-RL_Group_521_RoHS_L_2.pdf, GUID_1C=c10a41ba-7620-11e9-ab53-0050569f2651, Part Number=RL0603FR-070R51L, Part Type="Thick Film", Price=0,04488, Replacement=NONE, Supplier 1=Digi-Key
R10: library part RC0805JR-0722RL, "22 Ohms ±5%, 1/8W 0805 Thick Film Resistor", Manufacturer=Yageo, Package=0805, Power Rating=0.125W, Temperature Range="-55°C ~ 155°C", Temperature Stability=±100ppm/°C, Tolerance=±5%, Voltage=150V, Ajax_1C_ID=8822, Ajax_1C_PN="22R 5% 0805 Resistors SMD RoHS", Ajax_1С_Status="Mass Production", Component Status=Released, Component Type=SMD, ComponentLink1Description=Datasheet, ComponentLink1URL=https://eu.mouser.com/datasheet/2/447/PYu_RC_Group_51_RoHS_L_10-1664068.pdf, GUID_1C=3ba40fec-5951-11e6-81ec-d8cb8a9acc66, Part Number=RC0805JR-0722RL, Part Type="Thick Film", Price=0.0011, Replacement=NONE
R11: library part RC0805FR-07120RL, "100 Ohms ±1%, 1/8W 0805 Thick Film Resistor", Manufacturer=Yageo, Package=0805, Power Rating=0.125W, Temperature Range="-55°C ~ 155°C", Temperature Stability=±100ppm/°C, Tolerance=±1%, Voltage=150V, Ajax_1C_ID=14156, Ajax_1C_PN="120R 1% 0805 Resistors SMD RoHS", Ajax_1С_Status="Mass Production", Component Status=Released, Component Type=SMD, ComponentLink1Description=Datasheet, ComponentLink1URL=https://eu.mouser.com/datasheet/2/447/PYu_RC_Group_51_RoHS_L_10-1664068.pdf, GUID_1C=b31bb40e-dc54-11e8-ab4a-0050569f2651, Part Number=RC0805FR-07120RL, Part Type="Thick Film", Price=0,0014, Replacement=NONE
R12 R13: library part RC0805FR-071KL, "1 kOhms ±1%, 1/8W 0805 Thick Film Resistor", Manufacturer=Yageo, Package=0805, Power Rating=0.125W, Supplier Part Number 1=311-1.00KCRTR-ND, Temperature Range="-55°C ~ 155°C", Temperature Stability=±100ppm/°C, Tolerance=±1%, Voltage=150V, Ajax_1C_ID=8520, Ajax_1C_PN="1k 1% 0805 Resistors SMD RoHS", Ajax_1С_Status="Mass Production", Component Status=Released, Component Type=SMD, ComponentLink1Description=Datasheet, ComponentLink1URL=https://eu.mouser.com/datasheet/2/447/PYu_RC_Group_51_RoHS_L_10-1664068.pdf, GUID_1C=0c53a8ec-2890-11e6-81ae-d8cb8a9acc66, Part Number=RC0805FR-071KL, Part Type="Thick Film", Price=0,0014, Replacement=NONE, Supplier 1=Digi-Key
RICHG RVSET: library part RC0805FR-07120RL, Manufacturer=Yageo, Package=0805, Power Rating=0.125W, Temperature Range="-55°C ~ 155°C", Temperature Stability=±100ppm/°C, Tolerance=±1%, Voltage=150V, Ajax_1C_ID=14156, Ajax_1C_PN="120R 1% 0805 Resistors SMD RoHS", Ajax_1С_Status="Mass Production", Component Status=Released, Component Type=SMD, ComponentLink1Description=Datasheet, ComponentLink1URL=https://eu.mouser.com/datasheet/2/447/PYu_RC_Group_51_RoHS_L_10-1664068.pdf, GUID_1C=b31bb40e-dc54-11e8-ab4a-0050569f2651, Part Number=RC0805FR-07120RL, Part Type="Thick Film", Price=0,0014, Replacement=NONE
RNTC: library part RC0805FR-07120RL, Manufacturer=Yageo, Package=0805, Part Number=0805S8F5102T5E, Power Rating=0.125W, Temperature Range="-55°C ~ 155°C", Temperature Stability=±100ppm/°C, Tolerance=±1%, Voltage=150V, Ajax_1C_ID=14156, Ajax_1C_PN=0805S8F5102T5E, Ajax_1С_Status="Mass Production", Component Status=Released, Component Type=SMD, ComponentLink1Description=Datasheet, ComponentLink1URL=https://eu.mouser.com/datasheet/2/447/PYu_RC_Group_51_RoHS_L_10-1664068.pdf, GUID_1C=b31bb40e-dc54-11e8-ab4a-0050569f2651, Part Type="Thick Film", Price=0,0014, Replacement=NONE
TP1 TP2 TP3 TP4 TP5 TP6 TP7 TP8 TP9: "0.96mm Pad for Plug-In or Receptacle", Manufacturer=NONE, Ajax_1C_PN=NONE, Ajax_1С_Status="RND Only", Component Status=Released, Component Type=PTH, ComponentLink1Description=Datasheet, ComponentLink1URL=NONE, Part Number=PAD-0.96mm, Part Type=Pad, Price=NONE, Replacement=NONE, Temperature Range=NONE
VD1A VD1B VD2 VD4A VD4B: library part SS34, "Diode Schottky 60V 5A, SMC", Current=3A, Manufacturer=KLS, Package=SMC, Supplier Part Number 1=SS34FSCT-ND, Temperature Range="-55°C ~ 150°C", Voltage=60V, Component Status=Released, Component Type=SMD, ComponentLink1Description=Datasheet, Marking=SK56, Part Number=SK56, Part Type=Schottky, Price=0.03, Replacement=NONE, Standard Lead Time="14 Weeks", Supplier 1=Digi-Key, Vf="500mV @ 3A"
VD3 VD5A VD5B VD6A VD6B: "Zener Diode 4.7V, 300mW, ±1%, Leakage 3uA @ 2V, SOD-323", Manufacturer="Nexperia USA", Package=SOD-323, Supplier Part Number 1=771-BZX384-A4V7-QX, Temperature Range="-65°C ~ 150°C", Voltage=4.7V, Ajax_1C_PN=NONE, Ajax_1С_Status="RND Only", Component Status=Released, Component Type=SMD, ComponentLink1Description=Datasheet, ComponentLink1URL=https://eu.mouser.com/datasheet/2/916/BZX384_Q_SER-2721638.pdf, Marking=22, Part Number=BZX384-A4V7-QX, Part Type=Zener, Price=NONE, Replacement=NONE, Standard Lead Time="4 Weeks", Supplier 1=Mouser
VT1: library part IRF9358PbF, "MOSFET 2P-CH 30V 9.2A 8SOIC", Input Capacitace At Vds="1740pF @ -25V", Manufacturer="Infineon Technologies", Max Forward Diode Voltage=-1.2V, Max Junction Temp=+150°C, Package=PG-DSO-8, Power Dissipation=2W, Pulse Drain Current=-73A, Temperature="-55°C to +150°C", Temperature Range Low=-55°C, Category=Trans, Ipc Land Pattern Name=SOIC127P600X155-8, Lead Free=Yes, Manufacturer Part Number=IRF9358PBF, Mouser Description="Dual P-Channel 30 V 16.3 mOhm 19 nC HEXFET® Power Mosfet - SOIC-8", Number Of Channels=2, Number Of P Channels=2, Octopart=https://octopart.com/irf9358pbf-infineon-65873752, Reverse Recovery Charge=35nC, Reverse Recovery Time=55ns, RoHS=TRUE, Rthja Max=62.5°C/W, Standoff Height=0.1mm, Temperature Range High=+150°C, Threshold Vgs Max=-2.4V, Threshold Vgs Min=-1.3V, Transconductance=23S, Turn Off Delay Time=146ns, Turn On Delay Time=5.7ns
VT2: library part IRLML6344TRPBF, "30V, 5A max N-Channel HEXFET MOSFET, 29mOhm @ Vgs = 4.5V", Manufacturer="Infineon Technologies", Package=SOT-23, Supplier Part Number 1=IRLML6344TRPBFTR-ND, Temperature Range="-55°C ~ 150°C", Ajax_1C_ID=9416, Ajax_1C_PN="IRLML6344TRPBF  SOT23. полевой транзистор", Ajax_1С_Status="RND Only", Component Status=Released, Component Type=SMD, ComponentLink1Description=Datasheet, ComponentLink1URL=https://www.infineon.com/dgdl/irlml6344pbf.pdf?fileId=5546d462533600a4015356689c44262c, GUID_1C=8299d48f-df0c-11e6-829c-d8cb8a9acc66, Id=5A, Part Number=IRLML6344TRPBF, Part Type=N-Channel, Price=0.08596562, RDS=37mOhm, Replacement=NONE, Standard Lead Time="16 Weeks", Supplier 1=Digi-Key, Vds=30V
VT3: "60V, 300mA max N-Channel Trench MOSFET, 3.8Ohm @ Vgs = 4.5V", Manufacturer="Nexperia USA", Package=SOT-23, Supplier Part Number 1=1727-2764-2-ND, Temperature Range="-65°C ~ 150°C", Ajax_1C_ID=8875, Ajax_1C_PN="2N7002.215 , NXP полевой транзистор", Ajax_1С_Status="Mass Production", Component Status=Released, Component Type=SMD, ComponentLink1Description=Datasheet, ComponentLink1URL=https://assets.nexperia.com/documents/data-sheet/2N7002.pdf, GUID_1C=4d2e7416-6b97-11e6-8203-d8cb8a9acc66, Id=300mA, Part Number=2N7002,215, Part Type=N-Channel, Price=0.0202, RDS=5.3Ohm, Replacement=NONE, Standard Lead Time="4 Weeks", Supplier 1=Digi-Key, Vds=60V
VT4 VT5A VT5B: "50V, 100mA Low Vce(sat) NPN Digital Transistor, Pre-Biased 4.7k/47k (with built-in resistors)", Manufacturer=Onsemi, Package=SC-75, Supplier Part Number 1=DTC143ZET1GOSTR-ND, Temperature Range="-55°C ~ 150 °C", Ajax_1C_ID=9410, Ajax_1C_PN="DTC143ZET1G SC-75-3  биполярный NPN транзистор", Ajax_1С_Status="Mass Production", Component Status=Released, Component Type=SMD, ComponentLink1Description=Datasheet, ComponentLink1URL=http://www.onsemi.com/pub/Collateral/DTC143Z-D.PDF, GUID_1C=d76ac5d5-de69-11e6-829b-d8cb8a9acc66, Ic=100mA, Part Number=DTC143ZET1G, Part Type=NPN, Price=0.015, Replacement=NONE, Standard Lead Time="8 Weeks", Supplier 1=Digi-Key, Vce=50V
X1 X4 X5: library part CI3102P1V00, "WH Series 2.54mm Wire to Board Straight DIP Type Headers, 2 Pin", Manufacturer=CviLux, Temperature Range="-25℃ ~ 85℃", Component Type=PTH, ComponentLink1Description=Datasheet, Part Number=CI3102P1V00, Part Type="Wire-to-Board / Header", Price=0.02434867, Replacement=NONE
X2 X3: library part DG350-3.5-02P-14-00AH, "Screw Terminal, 3.5mm Pitch, 2 pin, Green", Manufacturer=Degson, Temperature Range="-40°C ~ 105°C", Ajax_1C_ID=21524, Ajax_1C_PN="DG350-3.5-02P-14-00AH, клеммник", Ajax_1С_Status="RND Only", Component Status=Released, Component Type=PTH, ComponentLink1Description=Datasheet, ComponentLink1URL=\\altiumdb.ajax.local\files\Datasheet\Connectors\DG350-3.5,3.96.pdf, GUID_1C=367ff815-d639-11ea-ab63-0050569f2651, Part Number=DG350-3.5-02P-14-00AH, Part Type=Terminal, Price=0,17091154, Replacement=NONE

## Free pads (board coordinates)
  round 6 hole 3.1: 4(3.355,15.009) 4(3.355,69.984) 4(115.824,55.88) 4(116.332,73.406) 4(130.406,15.009) 4(130.406,69.984)

## Via types
v1: diameter 0.6, hole 0.3, Top Layer to Bottom Layer, tented both sides, 706 vias

## Nets (pads, with @x,y where several pads share a name; then routed paths per layer and width w, separated by ;. In a path a pad name is that pad's centre, name@x,y a point inside that pad or via, vN(x,y) a via of type N, cw(c..) or ccw(c..) an arc to the next point about the centre after c; other vN are vias at no path point)
5V_CHARGER: C9.1 C10.1 C11.1 C15A.1 C17A.1 C19A.2 C22A.1 DD2.8 L4A.2 R4A.1 R7.1 TP2.1 | length 16.5
  Top Layer w0.35: 56.695,7.338 54.508,9.525 R4A.1@54.508,20.676 C19A.2@56.744,20.676
5V_EXT: C1A.1 C1B.1 C2A.1 C2B.1 C8.1 C15B.1 C17B.1 C18.1 C19B.2 C22B.1 D2A.5 D2B.5 L1A.1 L1B.1 L4B.2 R3.1 R4B.1 TP4.1 VT1.1@88.265,32.541 VT1.3@85.725,32.541 | length 19.3
  Top Layer w0.35: C19B.2@56.744,59.131 R4B.1@54.508,59.131 54.508,51.26 57.155,48.613 57.438,48.613 57.988,48.063 C15B.1@57.988,47.78 ; R3.1@81.864,32.002 82.039,32.002 82.364,31.677 82.364,31.642 82.942,31.064 85.513,31.064
12V_EXT: C16A.1 C16B.1 C20A.1 C20B.1 C21A.1 C21B.1 D1A.1 D1B.1 TP1.1 VD2.CA X5.1 | length 48.3
  Top Layer w2: C16A.1@20.244,26.815 10.744,36.315 10.744,61.646 10.813,61.715 C20B.1@20.244,61.715
BGND: BT1.1- BT1.2- BT2.1- BT2.2- C6.1 C7.2 FP2.1 Q1.2 Q1.3 Q2.2 Q2.3 Q3.2 Q3.3 Q4.2 Q4.3 VT3.3 | length 130.1
  Top Layer w0.45: 106.249,43.369 Q3.3@110.011,43.369 ; 106.249,44.019 Q3.2@110.011,44.019 ; 106.249,46.696 Q4.3@110.011,46.696 ; 106.249,47.346 Q4.2@110.011,47.346 ; 106.274,36.689 Q2.3@110.036,36.689 ; 106.274,37.339 Q2.2@110.036,37.339 ; 106.274,40.016 Q1.3@110.036,40.016 ; 106.274,40.666 Q1.2@110.036,40.666
  Top Layer w0.6: BT1.2-@103.45,32.15 103.45,31.881 104.697,30.633 104.967,30.633 109.819,25.781 FP2.1@114.189,25.781 VT3.3@118.559,25.781 123.114,25.781 123.8,26.467 123.8,27.393 C7.2@123.774,27.418 ; 107.772,34.493 107.784,34.482 v1(111.537,34.482) ; v1@116.916,34.493 116.928,34.482 C6.1@123.8,34.482
  Bottom Layer w0.6: v1@111.537,34.487 111.543,34.482 v1(116.916,34.482)
  Bottom Layer w4: BT1.1-@103.45,12.85 BT1.2-@103.45,32.15 BT2.1-@103.45,53.17 BT2.2-@103.45,72.47
cEN: R18A.1 R18B.1 R19A.1 R19B.1 TP3.1 X5.2 | length 189.7
  Top Layer w0.35: v1(8.966,55.042) 8.966,62.382 X5.2@10.77,64.186 10.77,68.478 26.238,83.947 52.146,83.947 ; v1(12.624,55.067) 12.624,55.042 26.746,40.919 46.152,40.919 50.317,36.754 R18A.1@50.317,35.19 ; v1(59.03,66.421) 53.391,72.06 R18B.1@52.124,72.06 52.124,83.925 52.146,83.947 ; v1(64.77,66.446) 79.477,66.446 80.226,65.697 R19B.1@80.226,64.121 83.806,64.121 TP3.1@83.82,64.135 ; R19A.1@80.086,82.104 80.086,83.312 79.451,83.947 52.146,83.947
  Bottom Layer w0.2: v1(59.03,66.421) v1@59.055,66.446
  Bottom Layer w0.35: v1(8.966,55.042) 8.992,55.067 v1(12.624,55.067) ; v1@59.055,66.446 v1(64.77,66.446)